# EAGLE board controller_bottom_plate (EAGLE 7.2.0)

Size 280.81 x 115 mm. Coordinates in mm from the lower left corner, seen from the top.
Copper layers (1*16): Top 0.035559375mm / dielectric 1.501140625mm / Bottom 0.035559375mm
Design rules "4pcb-33board": minimum track width 10mil, minimum drill 15mil, track to track 6mil, track to pad 6mil, pad to pad 6mil, via to via 6mil, smd to smd 6mil, copper to edge 10mil, drill to drill 10mil, minimum pad ring 10mil, minimum via ring 8mil, stop-mask expansion 4mil, vias tented up to drill 0mil, thermal gap 10mil

## Footprints (pad centres in the part's own frame; a part is rotated, then mirrored left to right if it is on the bottom)
CONTROLLER_OUTLINE = hole 2.8: 2,3.5; 248,3.5; 248,111.5; 2,111.5

## Placement (x,y rotation side)
U$3  [ATMEGA128RFA1]  141.41,114 270 top
U$5  [CONTROLLER_OUTLINE]  15.41,0 0 top

## Library data of the parts
U$3 = BOBs
U$5 = Controller